# Altium PCB PCB.PcbDoc
Units mm, origin at the board's own origin, x right, y up, seen from the top; angles counter-clockwise.
Board outline 57.5 x 42.5 mm, 2 copper layers (Top Layer, Bottom Layer), stack 2.071 mm thick; 24 components, 15 nets, 62 pads, 0 vias.
Unrouted connection lines stored in the file: 5.
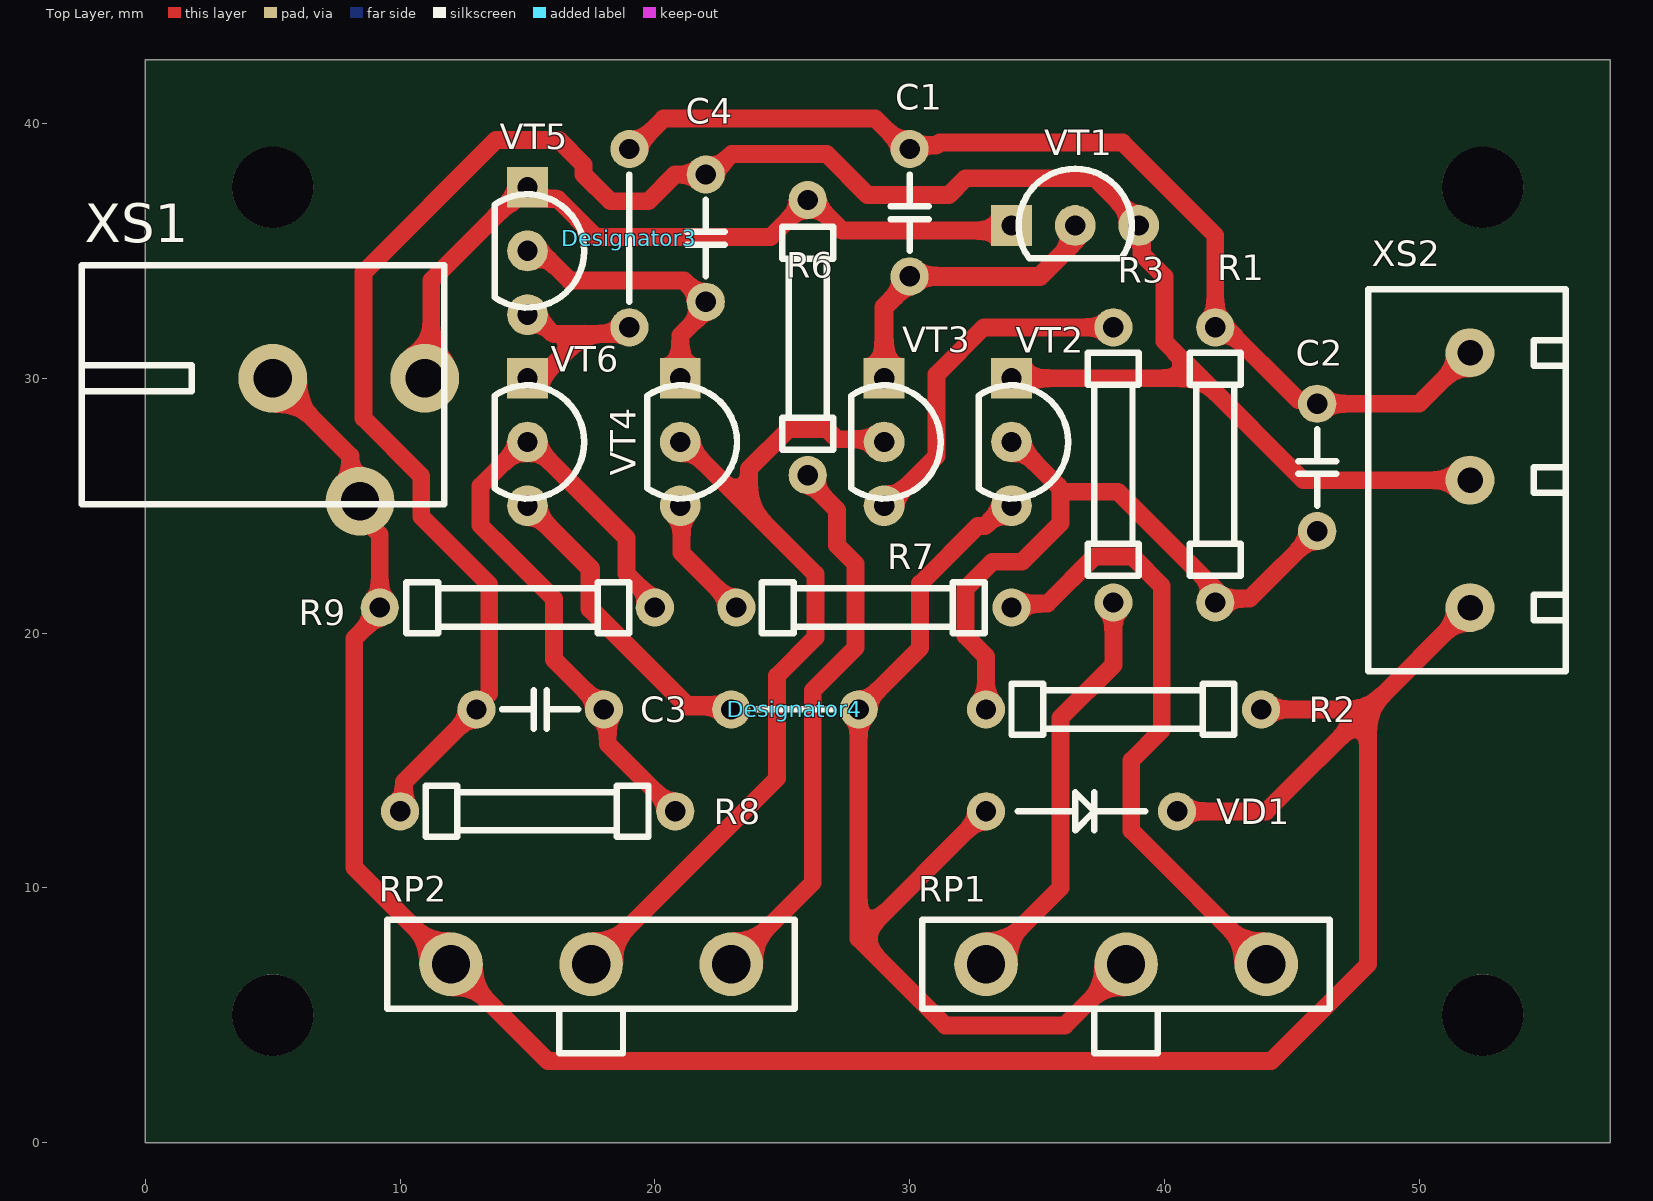
[diagram p0: Top Layer view]
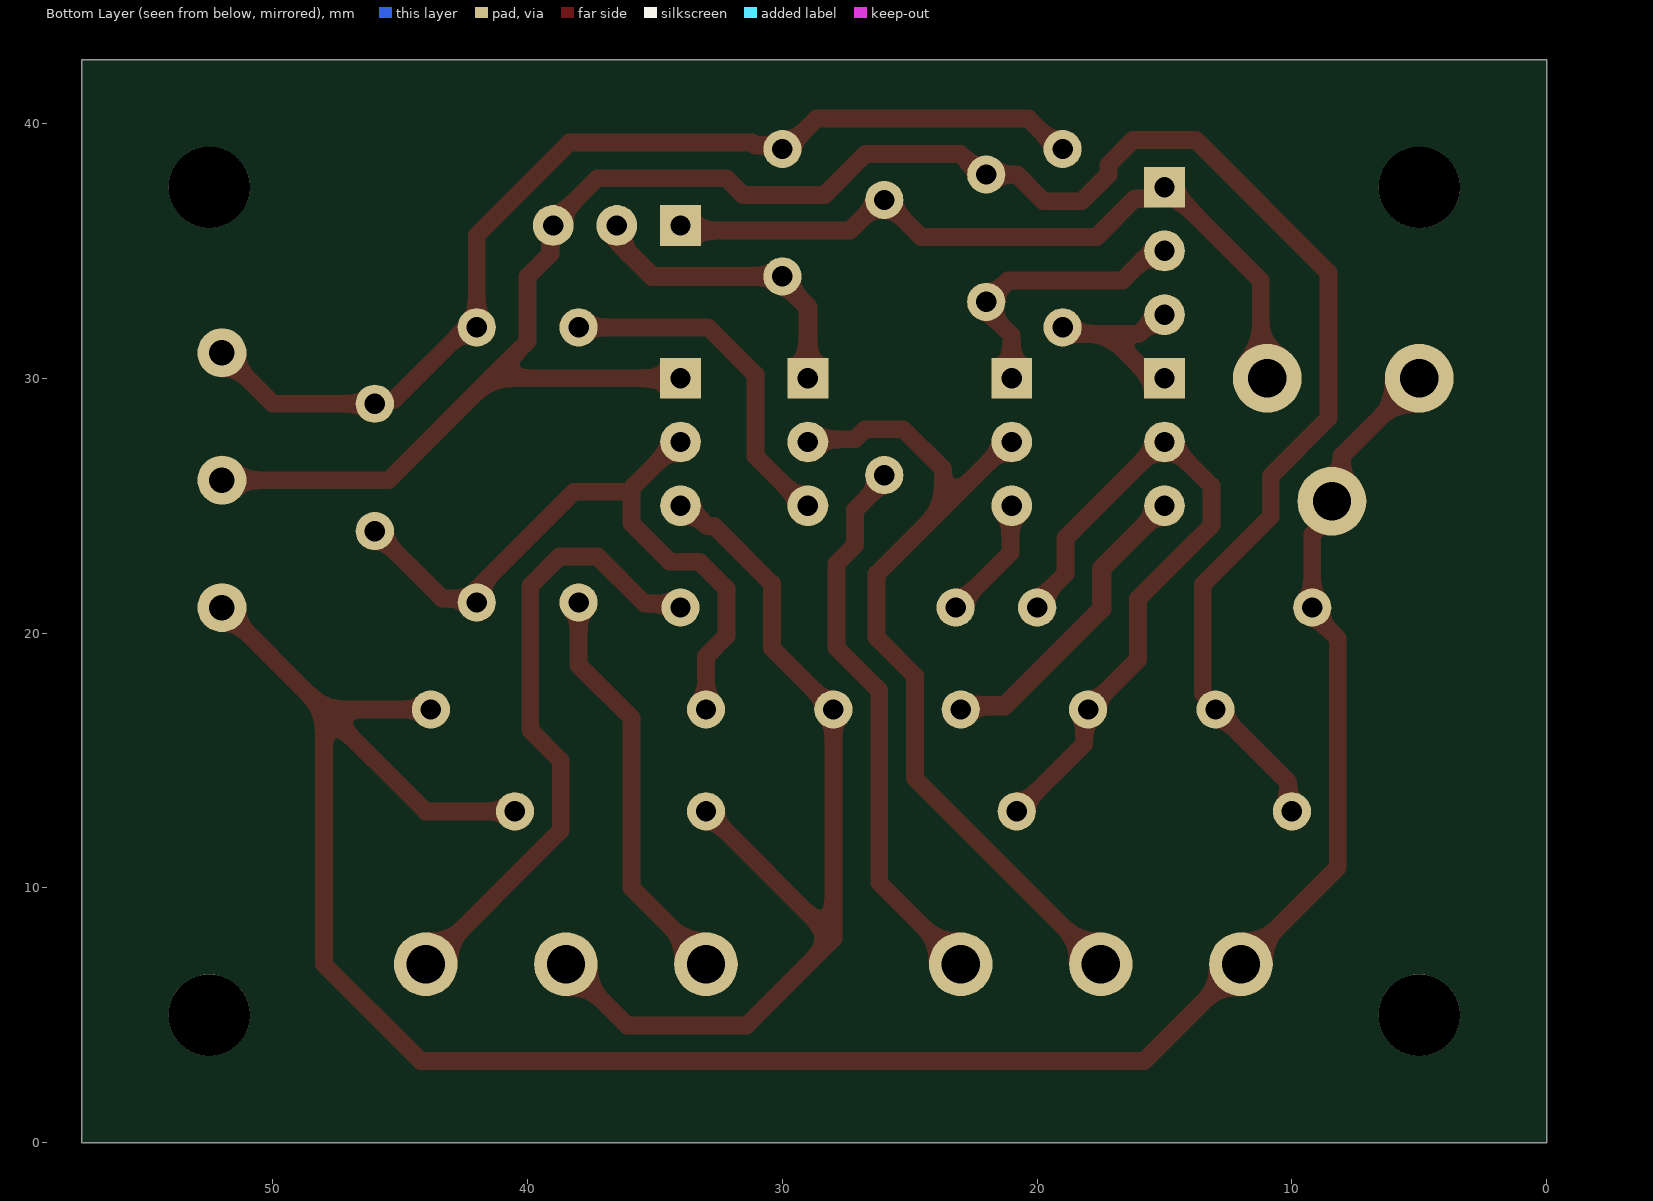
[diagram p1: Bottom Layer view, seen from below]
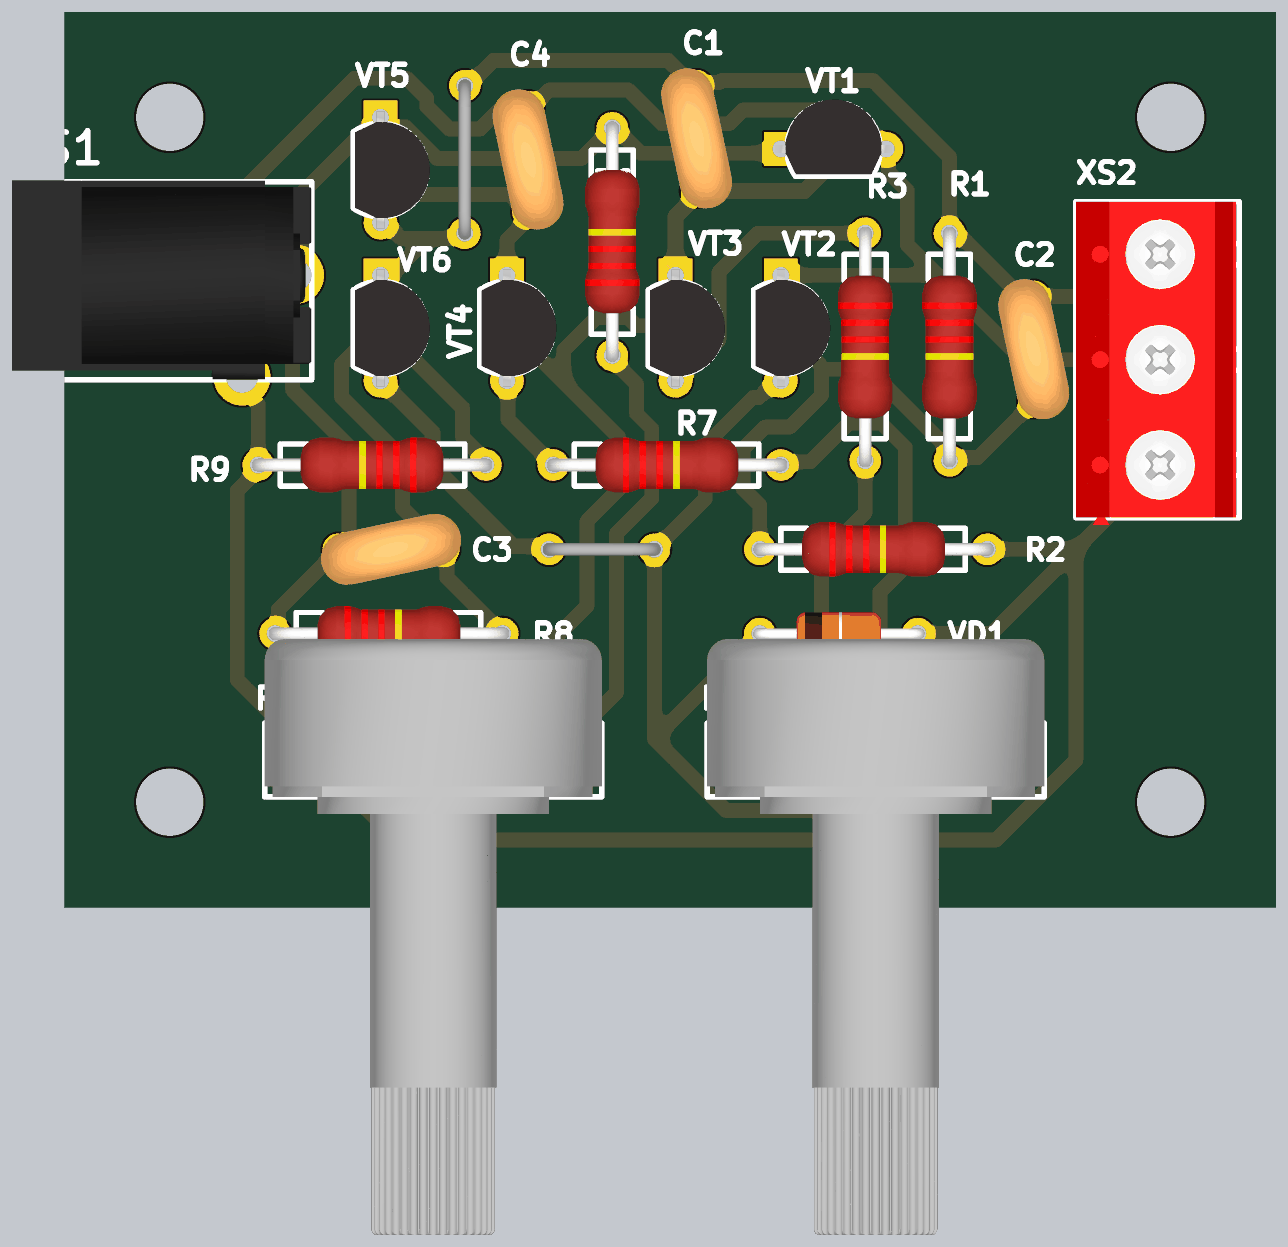
[diagram p2: 3D render of the assembled board from above, using the file's embedded part models]

## Layer stack, top to bottom
Top Solder: solder mask 0.0102, Solder Resist, Dk 3.5
Top Layer: signal copper 0.0356
Dielectric 1: dielectric 2, FR-4, Dk 4.8
Bottom Layer: signal copper 0.0356
Bottom Solder: solder mask 0.0102, Solder Resist, Dk 3.5

## Board outline
0,42.5 57.5,42.5 57.5,0 0,0

## Design rules (kind name [scope] priority, off if disabled: settings)
Clearance [All] p1: gap=0.254 ignorepadtopadclearanceinfootprint=FALSE except(0: Arc-Hole Track-Hole SMDPad-Hole THPad-Hole Via-Hole Fill-Hole Poly-Hole Region-Hole Text-Hole; 0.7: Arc-Arc Arc-Track Arc-THPad Track-Track Track-THPad)
PolygonConnect [All] p1: connectstyle=Relief reliefconductorwidth=0.254 reliefentries=4 polygonreliefangle="90 Angle" airgapwidth=0.254
RoutingLayers [All] p1: top layer_v5=TRUE bottom layer_v5=FALSE
RoutingVias [All] p1: holewidth=0.711 width=1.27 viastyle="Through Hole" minholewidth=0.711 minwidth=1.27 maxholewidth=0.711 maxwidth=1.27
SolderMaskExpansion [All] p1: expansion=0.102 istentingtop=FALSE
Width [All] p1: maxlimit=0.75 minlimit=0.254 preferedwidth=0.75 toplayer_minwidth=0.7 bottomlayer_maxwidth=0.254 bottomlayer_prefwidth=0.254 minimp=50.000000 maximp=50.000000 favimp=50.000000
29 further rules are at their usual default settings.

## Classes and differential pairs
component class E3: C1 C2 C3 C4 R1 R2 R3 R6 R7 R8 R9 RP1 RP2 VD1 VT1 VT2 VT3 VT4 VT5 VT6 XS1 XS2

## Components (designator, comment, footprint, x,y, rotation, side; value= is the part's Value field where it differs from the comment)
C1 "0,1мк" C_THT_5mm 30,34 r90 top
C2 "0,01мк" C_THT_5mm 46,29 r270 top
C3 "0,01мк" C_THT_5mm 13,17 r0 top
C4 "0,1мк" C_THT_5mm 22,33 r90 top
Designator3 "Comment" JUMPER_THT_7mm 19,32 r90 top
Designator4 "Comment" JUMPER_THT 23,17 r0 top
R1 "4,3к" R_THT_10.8mm 42,32 r270 top
R2 "2,2к" R_THT_10.8mm 33,17 r0 top
R3 "1к" R_THT_10.8mm 38,32 r270 top
R6 "510" R_THT_10.8mm 26,26.2 r90 top
R7 "1к" R_THT_10.8mm 23.2,21 r0 top
R8 "4,3к" R_THT_10.8mm 10,13 r0 top
R9 "2,2к" R_THT_10.8mm 20,21 r180 top
RP1 "20к" Potentiometer 38.5,7 r0 top
RP2 "10k" Potentiometer 17.5,7 r0 top
VD1 "VD" Diode_THT 39,13 r0 top
VT1 "2N3906" TO-92_EBC 36.5,36 r180 top
VT2 "BC547A" TO-92_CBE 34,27.5 r90 top
VT3 "BC547A" TO-92_CBE 29,27.5 r90 top
VT4 "BC547A" TO-92_CBE 21,27.5 r90 top
VT5 "2N3906" TO-92_EBC 15,35 r90 top
VT6 "BC547A" TO-92_CBE 15,27.5 r90 top
XS1 "XS2_R" XS2_Power 10.969,30 r180 top
XS2 "XS3_L" XS3 52,26 r90 top

## Footprints (in the part's own frame and the unit in brackets; to place one, negate y for a bottom-side part, rotate by r counter-clockwise, add the part's x,y. Pads: shape width x height; smd on the part's side, far side on the other; paste and mask are expansions set on the pad)
C_THT_5mm [mm]
  round 1.5 hole 0.8: 1(0,0) 2(5,0)
  silkscreen extent 1,-0.75 4,0.75, body extent -1.06,-1.92 6.06,1.92, height 7.83
Diode_THT [mm]
  round 1.5 hole 0.8: 1(-6,0) 2(1.5,0)
  silkscreen extent -4.75,-0.75 0.25,0.75, body extent -6.31,-1 1.81,1, height 3.01
JUMPER_THT [mm]
  round 1.5 hole 0.8: 1(0,0) 2(5,0)
  silkscreen extent 1,0 4,0, body extent -0.3,-0.3 5.3,0.3, height 4.3
JUMPER_THT_7mm [mm]
  round 1.5 hole 0.8: 1(0,0) 2(7,0)
  silkscreen extent 1,0 6,0, body extent -0.3,-0.3 7.3,0.3, height 3.3
Potentiometer [mm]
  round 2.5 hole 1.5: 1(-5.5,0) 2(0,0) 3(5.5,0)
  silkscreen extent -8,-3.5 8,1.75, body extent -8,-22.55 8,5.75, height 21.99
R_THT_10.8mm [mm]
  round 1.5 hole 0.8: 1(0,0) 2(10.8,0)
  silkscreen extent 1,-1 9.75,1, body extent -0.3,-1.3 11.1,1.29, height 4.3
TO-92_CBE [mm]
  rect 1.6x1.6 hole 0.8: 1(2.5,0)
  round 1.6 hole 0.8: 2(0,0) 3(-2.5,0)
  silkscreen extent -2.22,-2.22 2.22,1.29, body extent -2.77,-2.35 2.77,1.21, height 10.08
TO-92_EBC [mm]
  round 1.6 hole 0.8: 1(-2.5,0) 2(0,0)
  rect 1.6x1.6 hole 0.8: 3(2.5,0)
  silkscreen extent -2.22,-2.22 2.22,1.29, body extent -2.77,-2.35 2.77,1.21, height 10.08
XS2_Power [mm]
  round 2.7 hole 1.5: 1(0,0) 2(2.54,4.826) 2(5.969,0)
  silkscreen extent -0.76,-4.44 13.46,4.95, body extent -0.75,-4.5 13.45,4.95, height 11
XS3 [mm]
  round 1.924 hole 1: 1(-5,0) 2(0,0) 3(5,0)
  silkscreen extent -7.5,-3.75 7.5,4, body extent -7.85,-3.6 7.5,4, height 10.46

## Part data
C1 C2 C3 C4: library part C
R1 R2 R3 R6 R7 R8 R9: library part R
RP1 RP2: library part Potentiometer
VT1 VT5: library part VT_B_PNP
VT2 VT3 VT4 VT6: library part VT_B_NPN

## Free pads (board coordinates)
  round 3.2 hole 3.2 unplated: 0(5,5) 0(5,37.5) 0(52.5,5) 0(52.5,37.5)

## Nets (pads, with @x,y where several pads share a name; then routed paths per layer and width w, separated by ;. In a path a pad name is that pad's centre, name@x,y a point inside that pad or via, vN(x,y) a via of type N, cw(c..) or ccw(c..) an arc to the next point about the centre after c; other vN are vias at no path point)
GND: R2.2 R9.2 RP2.1 VD1.2 XS1.2 XS2.3 | length 94.9
  Top Layer w0.7: XS1.2@5,30 8.046,26.954 8.046,25.557 8.429,25.174 8.429,24.633 9.2,23.862 R9.2 9.2,20.784 8.2,19.784 8.2,10.8 RP2.1 15.8,3.2 44.2,3.2 48,7 48,17 ; VD1.2 44,13 48,17 ; R2.2 48,17 ; 52,21 48,17
NetC1_1: C1.1 VT1.2 VT3.1 | length 11.9
  Top Layer w0.75: VT3.1 29,32.797 C1.1@30,33.797 ; C1.1 35.12,34 36.337,35.217 36.337,35.837 VT1.2
NetC1_2: C1.2 C2.1 Designator3.1 Designator3.2 R1.1 VT5.1 VT6.1 XS2.2 | length 48.1
  Top Layer w0.7: VT5.1 15.244,32.5 15.994,31.75 17.25,31.75 ; VT6.1@15.25,29.75 17.25,31.75 ; Designator3.1@19,31.75 17.25,31.75 ; Designator3.2 19.146,39 20.346,40.2 28.654,40.2 29.854,39 C1.2 30.153,39.153 31.088,39.153 31.185,39.25 38.366,39.25 42,35.616 R1.1 ; R1.1@42.357,32.044 45.257,29.144 45.606,29.144 45.75,29 50,29 52,31
NetC2_2: C2.2 R1.2 R2.1 VT2.2 | length 27
  Top Layer w0.7: R2.1 33,19.081 32.2,19.881 32.2,21.746 33.254,22.8 34.416,22.8 35.925,24.309 35.925,25.547 38.178,25.547 41.847,21.879 41.847,21.353 R1.2 42.153,21.353 43.353,21.353 C2.2 ; VT2.2 34.116,27.5 35.85,25.766
NetC3_1: C3.1 C4.2 R8.1 VT1.1 VT2.1 XS2.1 | length 87.6
  Top Layer w0.7: R8.1 10.153,13.153 10.153,14.153 C3.1 ; C3.1@12.937,17.062 13.5,17.625 13.5,21.904 10.829,24.575 10.829,26.168 8.569,28.428 8.569,34.154 13.765,39.35 16.235,39.35 17.2,38.385 17.2,38.004 18.254,36.95 19.746,36.95 20.796,38 C4.2 22.216,38 23.016,38.8 26.746,38.8 28.346,37.2 31.548,37.2 32.198,37.85 37.266,37.85 39,36.116 VT1.1 39.108,35.892 39.108,34.892 40,34 40,31.454 41.454,30 ; VT2.1 41.454,30 ; 52,26 45.454,26 41.454,30
NetC3_2: C3.2 R8.2 R9.1 VT6.2 | length 27.1
  Top Layer w0.7: R9.1 20,21.216 18.89,22.326 18.89,23.726 15.116,27.5 VT6.2 14.884,27.5 13.15,25.766 13.15,24.234 14.234,23.15 16.04,21.343 16.04,18.96 C3.2 18.153,16.847 18.153,15.647 R8.2
NetC4_1: C4.1 VT4.1 VT5.2 | length 11.5
  Top Layer w0.7: VT5.2@15.25,35 15.494,35 16.656,33.838 21.146,33.838 21.984,33 22.2,33 22.2,32.875 21,31.675 VT4.1@21,29.75
NetR3_1: R3.1 VT3.3 | length 13.8
  Top Layer w0.7: VT3.3 29.116,25 31.059,26.942 31.059,30.144 32.915,32 R3.1
NetR3_2: R3.2 RP1.1 | length 16.3
  Top Layer w0.7: RP1.1 33,7.078 35.922,10 35.922,16.672 38,18.75 R3.2
NetR4_2: Designator4.1 Designator4.2 RP1.2 VD1.1 VT2.3 VT6.3 | length 52.3
  Top Layer w0.7: Designator4.1@23.125,17.125 Designator4.1@23.25,17 ; VD1.1 28,8 ; VT2.3 33.756,25 32.956,24.2 32.675,24.2 30.414,21.939 30.414,19.414 Designator4.2 28,8 ; RP1.2@38.4,6.45 RP1.2@38.5,6.55 ; RP1.2 36.1,4.6 31.4,4.6 28,8
  Top Layer w0.75: VT6.3 17.465,22.535 17.465,20.954 21.276,17.144 22.856,17.144 Designator4.1
NetR4_3: R7.2 RP1.3 | length 25.1
  Top Layer w0.7: R7.2 34.153,21.153 35.407,21.153 37.254,23 38.746,23 39.9,21.846 39.9,16.19 38.7,14.99 38.7,12.254 43.954,7 RP1.3 ; RP1.3@43.775,6.775 RP1.3@44,6.55
NetR5_2: RP2.2 VT3.2 VT4.2 | length 34.1
  Top Layer w0.7: RP2.2 24.8,14.3 24.8,18.325 26.3,19.825 26.3,22.316 23.7,24.916 ; VT4.2 21.116,27.5 23.7,24.916 ; VT3.2 28.895,27.605 27.15,27.605 26.755,28 25.254,28 23.7,26.446 23.7,24.916
NetR5_3: R6.1 RP2.3 | length 22.3
  Top Layer w0.7: RP2.3@22.5,6.55 RP2.3@22.75,6.8 ; RP2.3 26.2,10.2 26.2,17.746 27.875,19.421 27.875,22.721 27.15,23.446 27.15,24.833 26,25.983 R6.1
NetR6_2: R6.2 VT1.3 VT5.3 XS1.1 | length 30.2
  Top Layer w0.7: XS1.1 11.219,30.25 11.219,33.835 14.234,36.85 14.35,36.85 VT5.3 15.45,37.05 16.175,37.05 17.675,35.55 24.55,35.55 R6.2 26.146,37 27.346,35.8 29.254,35.8 30.746,35.8 33.8,35.8 VT1.3
NetR7_1: R7.1 VT4.3 | length 4.9
  Top Layer w0.7: VT4.3 21.05,24.95 21.05,23.15 R7.1

## Silkscreen, mask and mechanical layers (free items; w line width, h text height)
Drill Drawing:
  circle w0.254: c2.57,60.611 r0.847
  lines w0.254: 1.724,56.377 2.147,56.377 2.57,55.954 2.994,56.377 3.417,56.377 2.994,56.801 3.417,57.224 2.994,57.224 2.57,57.647 2.147,57.224 1.724,57.224 2.147,56.801 1.724,56.377 ; 1.724,65.267 3.417,65.267 2.57,63.574 1.724,65.267 ; 1.724,67.384 3.417,67.384 3.417,69.077 1.724,69.077 1.724,67.384
  lines w0.381: 0.205,54.811 268.202,54.811 ; 0.205,70.051 268.202,70.051 ; 14.197,51.001 14.197,73.861 ; 27.91,51.001 27.91,73.861 ; 57.619,51.001 57.619,73.861 ; 70.468,51.001 70.468,73.861 ; 89.107,51.001 89.107,73.861 ; 127.195,51.001 127.195,73.861 ; 142.177,51.001 142.177,73.861 ; 161.121,51.001 161.121,73.861 ; 177.626,51.001 177.626,73.861 ; 199.312,51.001 199.312,73.861 ; 233.186,51.001 233.186,73.861 ; 0.205,51.001 268.202,51.001 268.202,73.861 0.205,73.861 0.205,51.001
  text "Symbol" at 2.491,71.194 h1.83
  text "Count" at 15.34,71.194 h1.83
  text "Hole Size" at 29.053,71.194 h1.83
  text "Plated" at 58.762,71.194 h1.83
  text "Hole Type" at 71.611,71.194 h1.83
  text "Drill Layer Pair" at 90.25,71.194 h1.83
  text "Via/Pad" at 128.338,71.194 h1.83
  text "Pad Shape" at 143.32,71.194 h1.83
  text "Template" at 162.264,71.194 h1.83
  text "Description" at 178.769,71.194 h1.83
  text "Hole Tolerance (+)" at 200.455,71.194 h1.83
  text "Hole Tolerance (-)" at 234.329,71.194 h1.83
  text "3" at 15.34,67.384 h1.52
  text "1,000mm (39,37mil)" at 29.053,67.384 h1.52
  text "PTH" at 58.762,67.384 h1.52
  text "Round" at 71.611,67.384 h1.52
  text "Top Layer - Bottom Layer" at 90.25,67.384 h1.52
  text "Pad" at 128.338,67.384 h1.52
  text "Rounded" at 143.32,67.384 h1.52
  text "c192h100" at 162.264,67.384 h1.52
  text "4" at 15.34,63.574 h1.52
  text "3,200mm (125,98mil)" at 29.053,63.574 h1.52
  text "NPTH" at 58.762,63.574 h1.52
  text "Round" at 71.611,63.574 h1.52
  text "Top Layer - Bottom Layer" at 90.25,63.574 h1.52
  text "Pad" at 128.338,63.574 h1.52
  text "Rounded" at 143.32,63.574 h1.52
  text "c320hn320" at 162.264,63.574 h1.52
  text "9" at 15.34,59.764 h1.52
  text "1,500mm (59,06mil)" at 29.053,59.764 h1.52
  text "PTH" at 58.762,59.764 h1.52
  text "Round" at 71.611,59.764 h1.52
  text "Top Layer - Bottom Layer" at 90.25,59.764 h1.52
  text "Pad" at 128.338,59.764 h1.52
  text "Rounded" at 143.32,59.764 h1.52
  text "(Mixed)" at 162.264,59.764 h1.52
  text "46" at 15.34,55.954 h1.52
  text "0,800mm (31,50mil)" at 29.053,55.954 h1.52
  text "PTH" at 58.762,55.954 h1.52
  text "Round" at 71.611,55.954 h1.52
  text "Top Layer - Bottom Layer" at 90.25,55.954 h1.52
  text "Pad" at 128.338,55.954 h1.52
  text "(Mixed)" at 143.32,55.954 h1.52
  text "(Mixed)" at 162.264,55.954 h1.52
  text "62 Total" at 15.34,52.144 h1.52